# Altium PCB PCB.pcbdoc
Units mm, origin at the board's own origin, x right, y up, seen from the top; angles counter-clockwise.
Board outline 135.64 x 85.89 mm, 2 copper layers (Top Layer, Bottom Layer); 40 components, 49 nets, 156 pads, 109 vias.
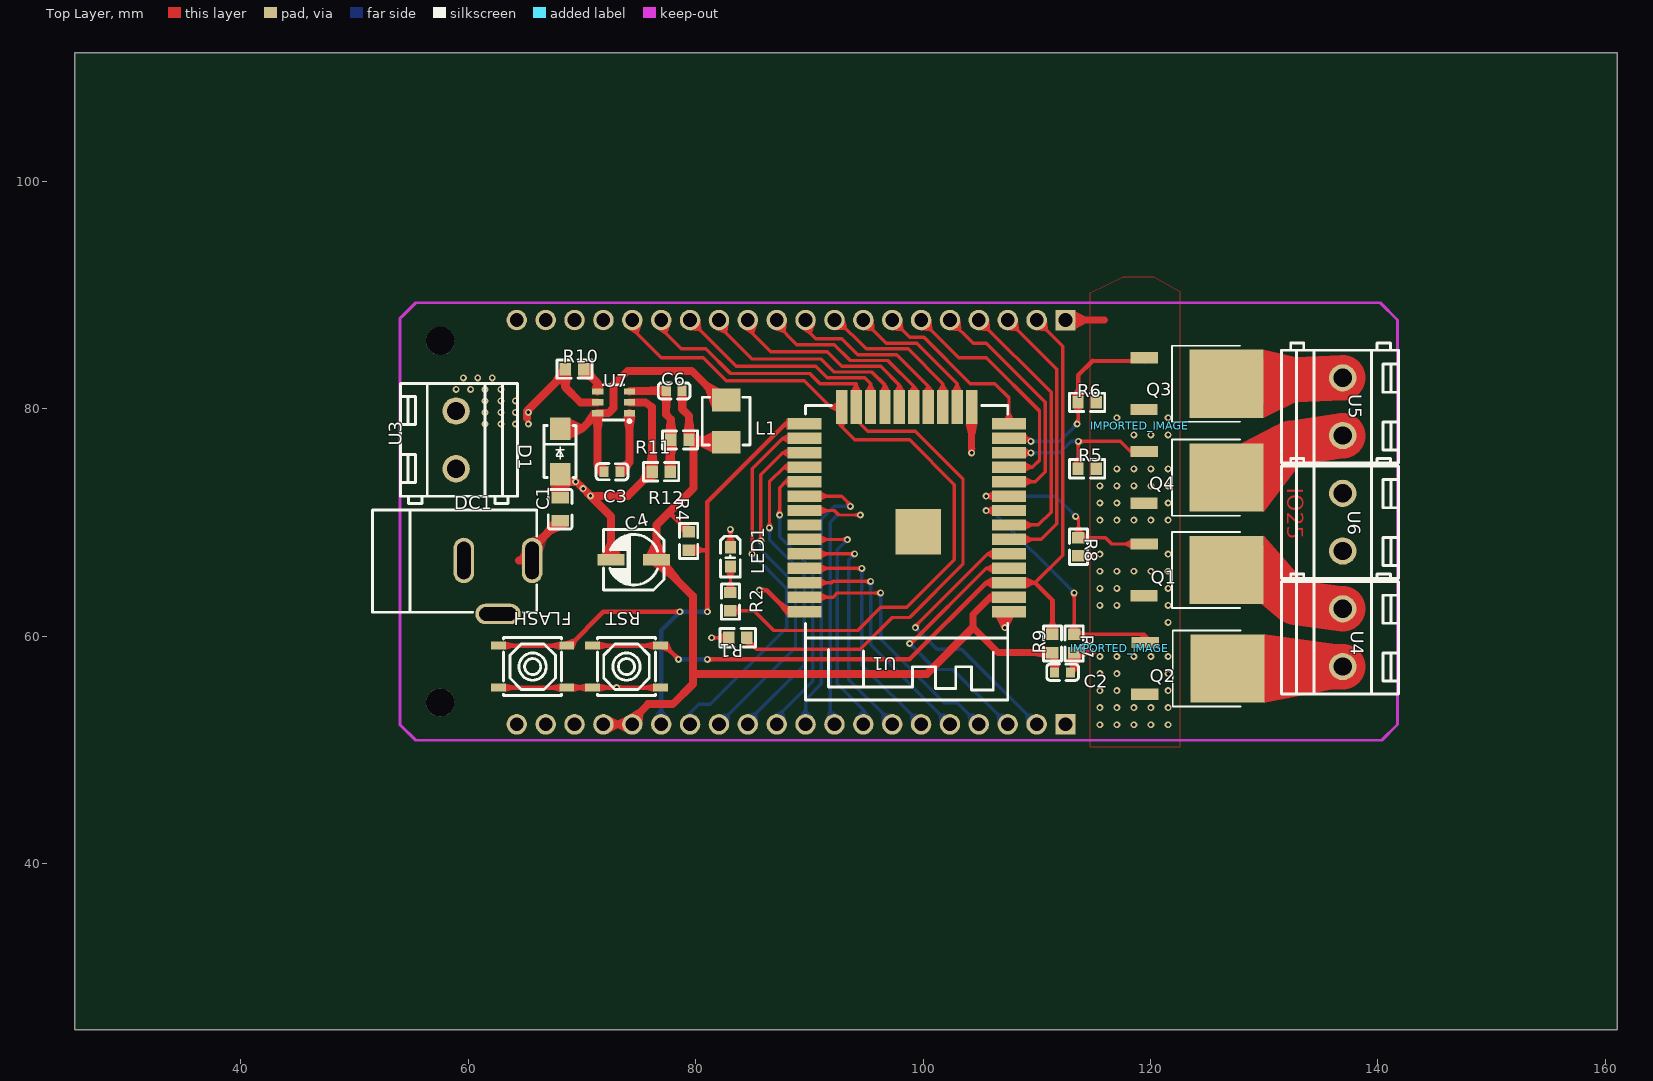
[diagram p0: Top Layer view]
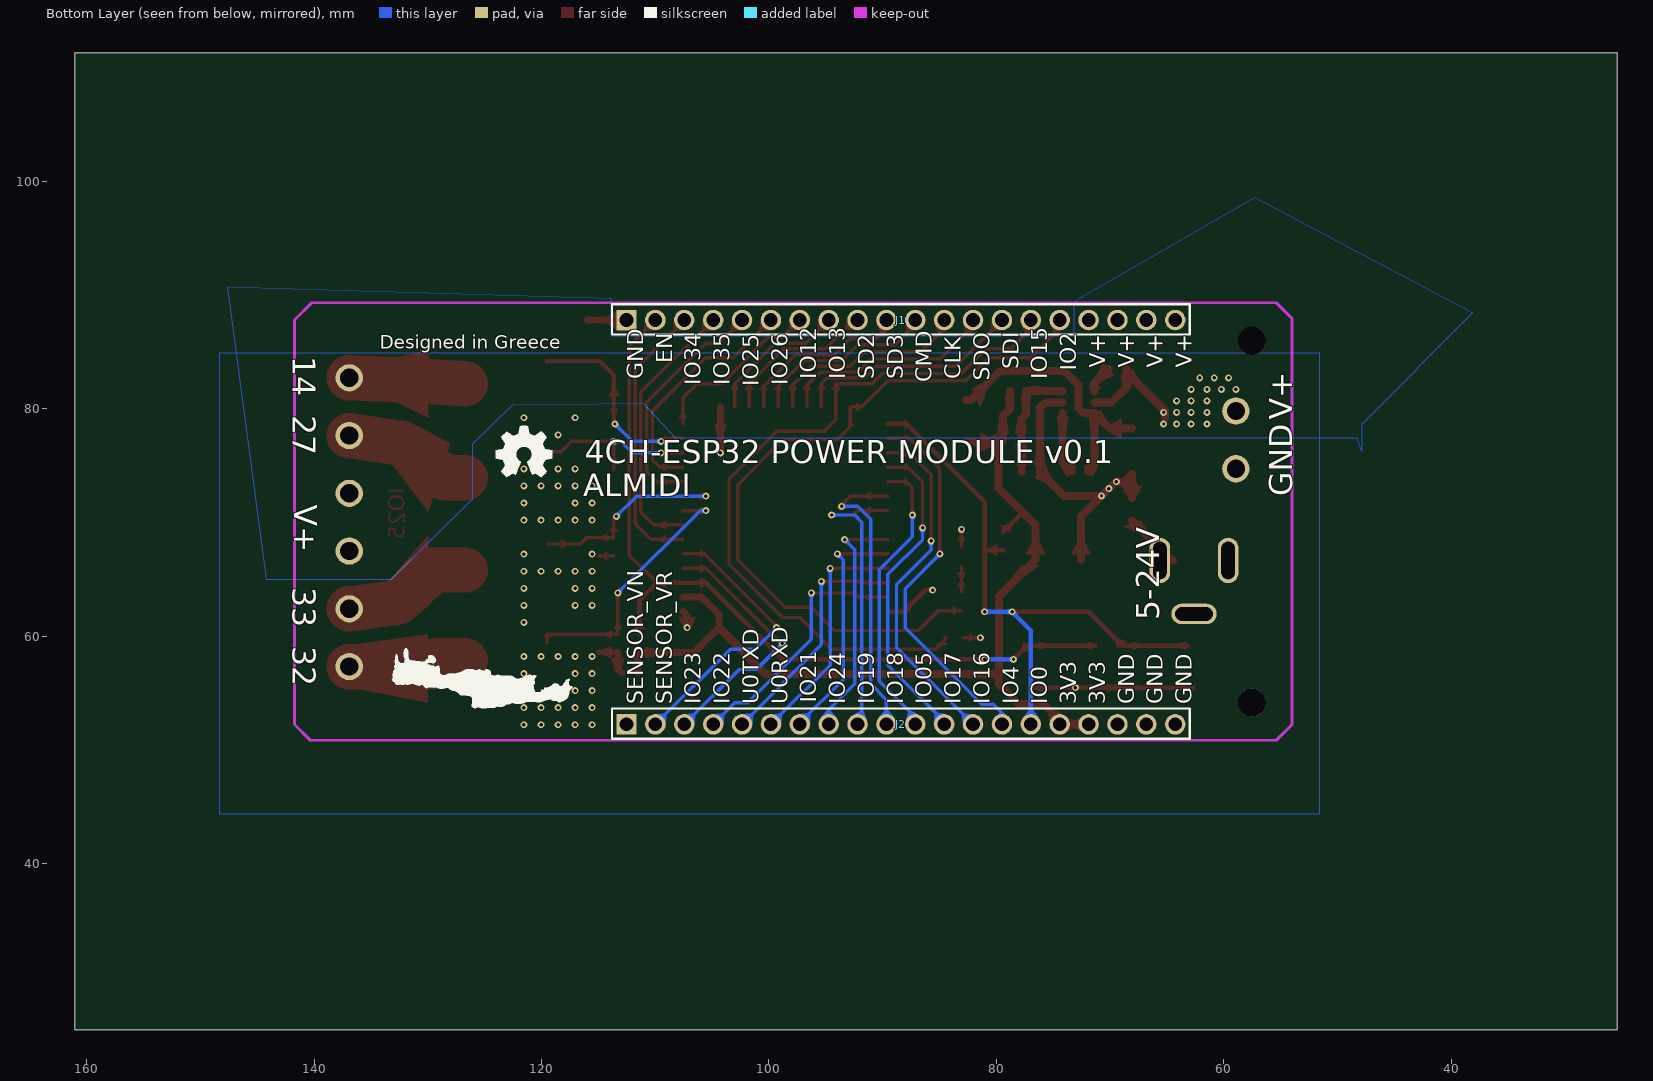
[diagram p1: Bottom Layer view, seen from below]

## Layer stack, top to bottom
Top Layer: signal copper (thickness not stored)
Dielectric: dielectric 0.32, FR-4, Dk 4.8
Bottom Layer: signal copper (thickness not stored)

## Board outline
161.036,25.4 25.4,25.4 25.4,111.295 161.036,111.295

## Components (designator, comment, footprint, x,y, rotation, side; value= is the part's Value field where it differs from the comment)
C1 "10uF" C0805 68.072,71.163 r90 top
C2 "22uF" C0603 112.268,56.812 r0 top
C3 "22nF" C0603 72.644,74.465 r180 top
C4 "47uF" CAP-SMD_BD5.0-L5.3-W5.3-RD 74.549,66.718 r0 top
C6 "100pF" C0603 78.105,81.577 r180 top
D1 "B230A-13-F" SMA_L4.4-W2.6-LS5.0-RD 68.072,76.243 r270 top
DC1 "DC-005-5A-2.0" DC-IN-TH_DC-005-5A-2.0 62.611,64.305 r0 top
FLASH "TS-1187A-B-A-B" SW-SMD_4P-L5.1-W5.1-P3.70-LS6.4 65.659,57.32 r0 top
IMPORTED_IMAGE "IMPORTED_IMAGE" IMPORTED_IMAGE 119.039,78.493 r0 top
IMPORTED_IMAGE "IMPORTED_IMAGE" IMPORTED_IMAGE 117.301,58.954 r0 top
J1 "Top Header" HDR-TH_20P-P2.54-V 88.392,87.8 r0 bottom
J2 "Bottom Header" HDR-TH_20P-P2.54-V 88.392,52.24 r0 bottom
L1 "3.3uH" IND-SMD_L4.2-W4.4_MWSA0402S-XX 82.677,78.91 r270 top
LED1 "0603White light_C2290" LED0603-R-RD 83.058,66.972 r270 top
Q1 "KIA30N06BD" TO-252-2_L6.6-W6.1-P4.57-LS9.9-TL-CW 123.063,65.829 r0 top
Q2 "KIA30N06BD" TO-252-2_L6.6-W6.1-P4.57-LS9.9-TL-CW 123.121,57.164 r0 top
Q3 "KIA30N06BD" TO-252-2_L6.6-W6.1-P4.57-LS9.9-TL-CW 123.063,82.212 r0 top
Q4 "KIA30N06BD" TO-252-2_L6.6-W6.1-P4.57-LS9.9-TL-CW 123.063,73.957 r0 top
R1 "1K" R0603 83.693,59.86 r180 top
R2 "100" R0603 83.058,63.035 r90 top
R4 "1K" R0603 79.375,68.369 r270 top
R5 "1K" R0603 114.427,74.719 r0 top
R6 "1K" R0603 114.427,80.561 r0 top
R7 "1K" R0603 113.284,59.352 r270 top
R8 "1K" R0603 113.665,67.861 r270 top
R9 "1K" R0603 111.379,59.352 r90 top
R10 "100K" R0603 69.342,83.482 r0 top
R11 "49.9K" R0603 78.613,77.259 r180 top
R12 "16.2K" R0603 76.962,74.465 r180 top
RST "TS-1187A-B-A-B" SW-SMD_4P-L5.1-W5.1-P3.70-LS6.4 73.914,57.32 r0 top
U1 "ESP32-S" WIRELM-SMD_ESP32-S 98.552,71.163 r180 top
U3 "DB128V-5.0-2P-OG" CONN-TH_DB128V-5.0-2P-XX 58.928,77.259 r90 top
U4 "DB128V-5.0-2P-OG" CONN-TH_DB128V-5.0-2P-XX 136.906,59.86 r270 top
U5 "DB128V-5.0-2P-OG" CONN-TH_DB128V-5.0-2P-XX 136.906,80.18 r270 top
U6 "DB128V-5.0-2P-OG" CONN-TH_DB128V-5.0-2P-XX 136.906,70.02 r270 top
U7 "AP5100WG-7" SOT-23-6_L2.9-W1.6-P0.95-LS2.8-BR 72.771,80.561 r0 top
? "" ? 97.79,46.084 r0 top
? "" ? 48.951,70.083 r0 top
? "" ? 51.883,87.663 r0 top
? "" ? 52.008,52.464 r0 top

## Footprints (in the part's own frame and the unit in brackets; to place one, negate y for a bottom-side part, rotate by r counter-clockwise, add the part's x,y. Pads: shape width x height; smd on the part's side, far side on the other; paste and mask are expansions set on the pad)
C0603 [mm]
  rect 0.8x0.9 smd: 1(-0.7,0) 2(0.7,0)
  silkscreen extent -1.4,-0.7 1.4,0.72
C0805 [mm]
  rect 1x1.55 smd: 1(-1,0) 2(1,0)
  silkscreen extent -1.75,-1.04 1.75,1.04
CAP-SMD_BD5.0-L5.3-W5.3-RD [mm]
  rect 2.4x1 smd: 1(2,0) 2(-2,0)
  silkscreen extent -2.65,-2.65 2.65,2.65
CONN-TH_DB128V-5.0-2P-XX [mm]
  round 2.4 hole 1.6: 1(-2.54,0) 2(2.54,0)
  silkscreen extent -5.59,-5.4 4.96,4.9
DC-IN-TH_DC-005-5A-2.0 [mm]
  oval 1.8x4 hole 1.2 slot 3.3 at 90 deg: 1(3,2.352) 2(-3,2.352)
  oval 4x1.8 hole 1.2 slot 3.3 at 0 deg: 3(0,-2.352)
  silkscreen extent -11.03,-2.2 3.4,6.81
HDR-TH_20P-P2.54-V [mm]
  rect 1.8x1.8 hole 1.2: 1(24.13,0)
  round 1.8 hole 1.2: 2(21.59,0) 3(19.05,0) 4(16.51,0) 5(13.97,0) 6(11.43,0) 7(8.89,0) 8(6.35,0) 9(3.81,0) 10(1.27,0) 11(-1.27,0) 12(-3.81,0) 13(-6.35,0) 14(-8.89,0) 15(-11.43,0) 16(-13.97,0) 17(-16.51,0) 18(-19.05,0) 19(-21.59,0) 20(-24.13,0)
  silkscreen extent -25.4,-1.4 25.4,1.27
IMPORTED_IMAGE [mm]
IND-SMD_L4.2-W4.4_MWSA0402S-XX [mm]
  rect 2x2.5 smd: 1(-1.85,0) 2(1.85,0)
  silkscreen extent -2.1,-2.1 2.1,2.1
LED0603-R-RD [mil]
  rect 43x39 smd: 1(33.5,0) 2(-33.5,0)
  silkscreen extent -72,-34 70,34
R0603 [mm]
  rect 1x1.1 smd: 1(-0.8,0) 2(0.8,0)
  silkscreen extent -1.55,-0.8 1.55,0.81
SMA_L4.4-W2.6-LS5.0-RD [mm]
  rect 2x1.8 smd: 1(-2,0) 2(2,0)
  silkscreen extent -2.3,-1.4 2.3,1.4
SOT-23-6_L2.9-W1.6-P0.95-LS2.8-BR [mm]
  rect 1x0.55 smd: 1(1.4,-0.95) 2(1.4,0) 3(1.4,0.95) 4(-1.4,0.95) 5(-1.4,0) 6(-1.4,-0.95)
  silkscreen extent -0.9,-1.78 1.52,1.55
SW-SMD_4P-L5.1-W5.1-P3.70-LS6.4 [mm]
  rect 1.3x0.7 smd: 1(-3,1.85) 2(3,1.85) 3(-3,-1.85) 4(3,-1.85)
  silkscreen extent -2.55,-2.55 2.55,2.55
TO-252-2_L6.6-W6.1-P4.57-LS9.9-TL-CW [mm]
  rect 2.409x0.979 smd: 1(-3.597,2.273) 3(-3.637,-2.273)
  rect 6.5x6 smd: 2(3.637,-0.012)
  silkscreen extent -1.17,-3.36 4.8,3.33
WIRELM-SMD_ESP32-S [mm]
  rect 3x1 smd: 1(-9,9.005) 2(-9,7.735) 3(-9,6.465) 4(-9,5.195) 5(-9,3.925) 6(-9,2.655) 7(-9,1.385) 8(-9,0.115) 9(-9,-1.155) 10(-9,-2.425) 11(-9,-3.695) 12(-9,-4.965) 13(-9,-6.235) 14(-9,-7.505) 25(9,-7.505) 26(9,-6.235) 27(9,-4.965) 28(9,-3.695) 29(9,-2.425) 30(9,-1.155) 31(9,0.115) 32(9,1.385) 33(9,2.655) 34(9,3.925) 35(9,5.195) 36(9,6.465) 37(9,7.735) 38(9,9.005)
  rect 1x3 smd: 15(-5.715,-9.005) 16(-4.445,-9.005) 17(-3.175,-9.005) 18(-1.905,-9.005) 19(-0.635,-9.005) 20(0.635,-9.005) 21(1.905,-9.005) 22(3.175,-9.005) 23(4.445,-9.005) 24(5.715,-9.005)
  rect 4x4 smd: 39(-1,1.995)
  silkscreen extent -8.89,-9.13 8.89,16.78
? [mm]

## Free pads (board coordinates)
  round 2.5 hole 2.5 unplated: ""(57.521,54.164) ""(57.521,85.964)

## Via types
v1: diameter 0.61, hole 0.305, Top Layer to Bottom Layer, tented both sides, 109 vias

## Nets (pads, with @x,y where several pads share a name; then routed paths per layer and width w, separated by ;. In a path a pad name is that pad's centre, name@x,y a point inside that pad or via, vN(x,y) a via of type N, cw(c..) or ccw(c..) an arc to the next point about the centre after c; other vN are vias at no path point)
C3_1: C3.1 U7.1 | length 5.5
  Top Layer w0.7: C3.1 74.171,75.292 U7.1
C6_2: C6.2 R11.2 R12.1 U7.3 | length 10.6
  Top Layer w0.7: U7.3 74.237,81.577 C6.2 ; C6.2 77.404,79.484 77.813,79.075 R11.2 77.762,77.208 R12.1
CH1: Q1.2 U4.1 | length 11.3
  Top Layer w4: Q1.2 129.469,65.816 132.721,62.964 U4.1
CH2: Q2.2 U4.2 | length 10.4
  Top Layer w4: Q2.2@126.7,57.815 129.172,57.815 129.667,57.32 U4.2
CH3: Q3.2 U5.1 | length 10.2
  Top Layer w4: Q3.2 132.721,82.564 U5.1
CH4: Q4.2 U5.2 | length 11.3
  Top Layer w4: Q4.2 128.511,73.944 132.321,76.964 U5.2
CLK: J1.12 U1.20 | length 18.1
  Top Layer w0.3: J1.12 84.582,87.038 86.614,85.006 91.567,85.006 92.837,83.736 96.266,83.736 97.917,82.085 U1.20
CMD: J1.11 U1.19 | length 16.5
  Top Layer w0.3: J1.11 87.122,87.419 88.9,85.641 92.202,85.641 93.599,84.244 96.901,84.244 99.187,81.958 U1.19
EN: J1.2 R9.2 RST.1 RST.2 U1.3 | length 72.1
  Top Layer w0.3: 109.842,64.698 112.268,67.124 112.268,85.514 J1.2
  Top Layer w0.4: RST.1@71.295,59.17 RST.2 77.271,59.17 v1(78.486,57.955) ; v1(81.026,57.955) 98.806,57.955 105.549,64.698 U1.3 109.843,64.698 111.379,63.162 R9.2
  Bottom Layer w0.4: v1(78.486,57.955) v1(81.026,57.955)
G_1: Q1.1 R8.1 U1.9 | length 18.6
  Top Layer w0.3: v1(105.537,72.306) 107.54,72.306 U1.9 ; v1(113.411,70.528) 113.665,70.274 R8.1 116.04,68.661 116.599,68.102 Q1.1
  Bottom Layer w0.3: v1(105.537,72.306) 111.633,72.306 v1(113.411,70.528)
G_2: Q2.1 R7.1 U1.8 | length 23.3
  Top Layer w0.3: v1(105.537,71.036) 107.54,71.036 U1.8 ; R7.1 v1(113.284,63.797) ; R7.1 119.466,60.152 Q2.1
  Bottom Layer w0.3: v1(105.537,71.036) 106.045,71.036 v1(113.284,63.797)
G_3: Q3.1 R6.1 U1.13 | length 17.5
  Top Layer w0.3: U1.13 109.208,77.398 v1(109.474,77.132) ; v1(113.538,78.656) 113.627,78.745 R6.1
  Top Layer w0.4: R6.1 113.627,82.936 114.922,84.231 Q3.1@119.521,84.164
  Bottom Layer w0.3: v1(109.474,77.132) 112.014,77.132 v1(113.538,78.656)
G_4: Q4.1 R5.1 U1.12 | length 15.1
  Top Layer w0.3: U1.12 109.462,76.128 v1(109.474,76.116) ; R5.1 113.627,77.094 v1(113.665,77.132) 117.348,77.132 118.25,76.23 Q4.1
  Bottom Layer w0.3: v1(109.474,76.116) 112.014,76.116 113.03,77.132 v1(113.665,77.132)
GND: C1.2 C2.2 C4.2 D1.2 DC1.2 DC1.3 FLASH.3 FLASH.4 J1.1 J2.18 J2.19 J2.20 LED1.2 Q1.3 Q2.3 Q3.3 Q4.3 R1.2 R5.2 R6.2 R7.2 R8.2 R12.2 RST.3 RST.4 U1.1 U1.15 U1.38 U3.1 U7.2 | length 61.6
  Top Layer w0.3: v1(81.407,59.86) R1.2 ; LED1.2 v1(83.058,69.385) ; R8.2 114.935,67.061
  Top Layer w0.4: FLASH.3 FLASH.3@62.829,55.47 ; FLASH.3@63.167,55.47 FLASH.4 RST.3 v1(73.043,55.47) ; v1(73.043,55.47) RST.4 ; v1(85.598,64.051) 86.233,64.051 88.125,62.158 U1.38
  Top Layer w0.5: R7.2 113.322,58.59 114.935,58.59
  Top Layer w0.6: v1(104.267,76.116) U1.15 ; v1(107.188,60.749) 107.188,61.794 U1.1 ; J1.1 115.951,87.8 ; C2.2 113.284,57.128 R7.2
  Top Layer w0.7: C1.2 D1.2 68.739,73.576 v1(69.443,73.576) 69.501,73.576 v1(70.104,72.973) v1(70.747,72.329) ; C4.2 72.549,70.528 v1(70.747,72.329) ; U7.2 75.565,80.561 76.162,80.136 76.162,78.275 R12.2 74.027,72.329 v1(70.747,72.329)
  other v1: 115.54,52.208 117.04,52.208 118.54,52.208 120.04,52.208 121.54,52.208 115.54,53.708 117.04,53.708 118.54,53.708 120.04,53.708 121.54,53.708 115.54,55.208 117.04,55.208 121.54,55.208 115.54,56.708 117.04,56.708 121.54,56.708 115.54,58.208 117.04,58.208 118.54,58.208 120.04,58.208 121.54,58.208 121.54,61.208 115.54,62.708 117.04,62.708 121.54,62.708 115.54,64.208 117.04,64.208 121.54,64.208 115.54,65.708 117.04,65.708 118.54,65.708 120.04,65.708 121.54,65.708 115.54,67.208 121.54,67.208 115.54,70.208 117.04,70.208 118.54,70.208 120.04,70.208 121.54,70.208 115.54,71.708 117.04,71.708 121.54,71.708 115.54,73.208 117.04,73.208 118.54,73.208 120.04,73.208 121.54,73.208 117.04,74.708 118.54,74.708 120.04,74.708 121.54,74.708 118.54,77.708 120.04,77.708 121.54,77.708 117.04,79.208 121.54,79.208
IO0: FLASH.1 FLASH.2 J2.15 R4.2 U1.25 | length 52.4
  Top Layer w0.4: FLASH.1@63.167,59.17 FLASH.2 68.906,59.17 71.882,62.146 v1(78.613,62.146) ; R4.2 81.026,67.574 ; v1(81.026,62.146) 81.026,71.798 87.897,78.668 U1.25
  Bottom Layer w0.4: J2.15 76.962,60.495 v1(78.613,62.146) v1(81.026,62.146)
IO2: J1.16 R2.1 U1.24 | length 65.4
  Top Layer w0.3: J1.16 74.422,87.038 76.962,84.498 80.645,84.498 82.677,82.466 89.535,82.466 91.833,80.168 U1.24 92.837,78.402 93.98,77.259 98.806,77.259 102.743,73.322 102.743,66.718 98.552,62.527 96.266,62.527 94.234,60.495 86.868,60.495 85.128,62.235 R2.1
IO4: J2.14 U1.26 | length 33.6
  Top Layer w0.3: v1(84.963,67.226) 84.963,74.719 87.643,77.398 U1.26
  Bottom Layer w0.3: J2.14 79.502,53.256 80.264,54.018 81.28,54.018 88.011,60.749 88.011,64.178 v1(84.963,67.226)
IO5: J2.11 U1.29 | length 25.7
  Top Layer w0.3: v1(87.376,70.655) 87.376,73.068 87.897,73.588 U1.29
  Bottom Layer w0.3: J2.11 87.122,52.875 90.297,56.05 90.297,65.829 87.376,68.75 v1(87.376,70.655)
IO12: J1.7 U1.14 | length 15.4
  Top Layer w0.3: J1.7 98.806,86.276 100.076,86.276 104.14,82.212 106.299,82.212 107.552,80.959 U1.14
IO13: J1.8 U1.16 | length 12.6
  Top Layer w0.3: J1.8 96.774,85.768 99.441,85.768 102.997,82.212 U1.16
IO15: J1.15 R1.1 U1.23 | length 64.8
  Top Layer w0.3: J1.15 76.962,87.038 78.74,85.26 80.899,85.26 83.058,83.101 90.043,83.101 90.932,82.212 94.107,82.212 U1.23 94.107,79.037 95.123,78.021 99.314,78.021 103.505,73.83 103.505,66.337 98.806,61.638 97.282,61.638 94.488,58.844 88.138,58.844 85.344,58.844 84.493,59.695 R1.1
IO16: J2.13 U1.27 | length 30.6
  Top Layer w0.3: v1(85.725,68.369) 85.725,74.211 87.642,76.128 U1.27
  Bottom Layer w0.3: J2.13 88.773,58.971 88.773,64.559 85.725,67.607 v1(85.725,68.369)
IO17: J2.12 U1.28 | length 28.2
  Top Layer w0.3: v1(86.487,69.512) 86.487,73.576 87.769,74.858 U1.28
  Bottom Layer w0.3: J2.12 84.582,52.494 89.535,57.447 89.535,65.448 86.487,68.496 v1(86.487,69.512)
IO18: J2.10 U1.30 | length 26.1
  Top Layer w0.3: U1.30 92.825,72.318 93.599,71.544 v1(93.599,71.417)
  Bottom Layer w0.3: J2.10 89.662,54.399 91.059,55.796 91.059,70.274 92.202,71.417 v1(93.599,71.417)
IO19: J2.9 U1.31 | length 26.2
  Top Layer w0.3: U1.31 92.19,71.048 92.583,70.655 v1(94.488,70.655)
  Bottom Layer w0.3: J2.9 91.821,52.24 91.821,70.02 92.456,70.655 v1(94.488,70.655)
IO21: J2.8 U1.33 | length 21.4
  Top Layer w0.3: U1.33 89.564,68.496 v1(93.345,68.496)
  Bottom Layer w0.3: v1(93.345,68.496) 92.456,67.607 92.456,55.796 94.742,53.51 J2.8
IO22: J2.5 U1.36 | length 21.3
  Top Layer w0.3: U1.36 91.96,64.698 92.075,64.813 v1(95.377,64.813)
  Bottom Layer w0.3: v1(95.377,64.813) 95.377,59.225 J2.5
IO23: J2.4 U1.37 | length 22.7
  Top Layer w0.3: U1.37 92.087,63.428 92.456,63.797 v1(96.266,63.797)
  Bottom Layer w0.3: v1(96.266,63.797) 96.266,59.733 101.854,54.145 102.997,54.145 J2.4
IO25: J1.5 U1.10 | length 21
  Top Layer w0.3: J1.5 104.394,85.768 105.537,85.768 110.744,80.561 110.744,74.465 109.868,73.588 U1.10
IO26: J1.6 U1.11 | length 21
  Top Layer w0.3: J1.6 103.124,84.498 105.537,84.498 110.236,79.799 110.236,75.481 109.614,74.858 U1.11
IO34: J1.3 U1.6 | length 24.5
  Top Layer w0.3: J1.3 111.76,83.482 111.76,69.893 110.376,68.508 U1.6
IO35: J1.4 U1.7 | length 23.7
  Top Layer w0.3: J1.4 111.252,81.45 111.252,70.909 110.122,69.778 U1.7
J2_1: J2.1
L1_1: C3.2 D1.1 L1.1 U7.6 | length 24.4
  Top Layer w0.7: D1.1 70.003,78.243 U7.6 ; C3.2 71.371,75.038 U7.6 ; L1.1 82.224,80.76 79.647,83.337 74.023,83.337 72.771,82.085 72.771,80.053 72.329,79.611 U7.6
LED1_1: LED1.1 R2.2 | length 2.3
  Top Layer w0.3: R2.2 LED1.1
NC: U1.32
R10_2: R10.2 U7.4 | length 2.5
  Top Layer w0.7: R10.2 71.371,82.253 U7.4
S$68: 
SD2: J1.9 U1.17 | length 13.9
  Top Layer w0.3: J1.9 92.456,87.8 94.996,85.26 98.679,85.26 101.727,82.212 U1.17
SD3: J1.10 U1.18 | length 15.5
  Top Layer w0.3: J1.10 89.662,87.038 90.551,86.149 92.837,86.149 94.234,84.752 97.663,84.752 100.457,81.958 U1.18
SDI: J1.14 U1.22 | length 20.2
  Top Layer w0.3: J1.14 83.566,83.736 90.551,83.736 91.567,82.72 94.869,82.72 95.377,82.212 U1.22
SDO: J1.13 U1.21 | length 19.2
  Top Layer w0.3: J1.13 82.042,87.292 84.963,84.371 91.059,84.371 92.202,83.228 95.504,83.228 96.647,82.085 U1.21
SENSOR_VN: J2.2 U1.5 | length 25.2
  Top Layer w0.3: v1(99.314,60.749) 99.314,60.876 105.676,67.238 U1.5
  Bottom Layer w0.3: v1(99.314,60.749) 101.219,58.844 103.378,58.844 J2.2
SENSOR_VP: J2.3 U1.4 | length 23.1
  Top Layer w0.3: v1(98.806,59.352) 98.933,59.352 105.549,65.968 U1.4
  Bottom Layer w0.3: v1(98.806,59.352) 101.092,57.066 102.616,57.066 J2.3
U0RXD: J2.7 U1.34 | length 21.2
  Top Layer w0.3: U1.34 93.98,67.238 v1(93.98,67.226)
  Bottom Layer w0.3: v1(93.98,67.226) 93.472,66.718 93.472,56.177 97.282,52.367 J2.7
U0TXD: J2.6 U1.35 | length 20.9
  Top Layer w0.3: U1.35 89.564,65.956 v1(94.615,65.956)
  Bottom Layer w0.3: v1(94.615,65.956) 94.615,57.447 J2.6
U1_39: U1.39
V24: C1.1 DC1.1 J1.17 J1.18 J1.19 J1.20 R10.1 U3.2 U6.1 U6.2 U7.5 | length 15.8
  Top Layer w0.7: 64.468,66.656 64.566,66.656 C1.1 ; 65.151,79.164 65.151,79.799 68.542,83.19 R10.1 68.542,81.869 69.85,80.561 U7.5
  other v1: 61.468,78.656 62.865,78.656 64.135,78.656 65.278,78.656 61.468,79.672 62.865,79.672 64.135,79.672 65.278,79.672 61.468,80.688 62.865,80.688 64.135,80.688 58.928,81.704 60.198,81.704 61.468,81.704 62.865,81.704 59.563,82.72 60.833,82.72 62.103,82.72
VCC: C2.1 C4.1 C6.1 J2.16 J2.17 L1.2 R4.1 R9.1 R11.1 U1.2 | length 89.8
  Top Layer w0.4: 77.663,70.883 R4.1
  Top Layer w0.6: U1.2 105.93,63.428 104.394,61.892 104.394,60.749 106.591,58.552 ; R9.1 106.591,58.552 ; C2.1 111.567,58.021 111.036,58.552 106.591,58.552
  Top Layer w0.7: J2.17 J2.16 74.422,52.621 75.819,54.018 77.978,54.018 79.756,55.796 79.756,56.685 ; C4.1 76.548,69.768 79.794,73.014 79.794,76.878 R11.1 ; C4.1 79.756,63.511 79.756,56.685 ; C6.1 78.806,79.987 79.413,79.38 R11.1 ; L1.2 79.612,77.06 R11.1 ; 104.394,60.749 100.33,56.685 79.756,56.685

## Polygon pours and split planes (outlines as drawn)
GND on Bottom Layer (solid): 51.562,84.879 148.336,84.879 148.336,44.366 51.562,44.366
V24 on Bottom Layer (solid): 38.1,88.435 47.879,78.656 47.879,76.243 48.26,77.386 108.204,77.386 110.998,80.434 122.555,80.307 126.111,76.878 126.111,72.052 133.27,64.94 144.145,64.94 147.574,90.721 113.919,89.705 113.919,86.403 73.152,86.403 73.152,89.451 57.277,98.595
V24 on Top Layer (solid): 68.199,64.686 67.31,63.67 63.881,63.67 62.23,65.321 62.23,70.909 62.23,74.592 59.817,77.005 58.293,77.005 56.642,78.656 56.642,80.815 59.309,83.482 62.23,83.482 66.04,79.672 66.04,69.893 68.199,67.734 68.199,67.226 68.199,66.337 68.199,65.448
GND on Top Layer (solid): 122.555,90.34 122.555,83.228 122.555,50.208 114.681,50.208 114.681,82.593 114.681,83.609 114.681,90.213 117.602,91.61 120.269,91.61

## Other copper
Top Layer:
  region net GND: 113.422,87.05 113.422,88.55 114.322,88.1 114.322,87.5
  region net R10_2: 70.871,81.786 71.871,81.786 71.721,82.253 71.021,82.253
  region net L1_1: 71.871,79.336 70.871,79.886 70.279,79.013 70.917,78.662
  region net L1_1: 71.871,79.336 70.871,79.336 71.021,78.286 71.721,78.286
  region net C3_1: 74.671,79.336 73.671,79.336 73.821,78.286 74.521,78.286
  region net G_4: 118.262,75.855 118.262,76.605 118.25,76.38 118.25,76.08
  region net CH4: 128.008,76.944 129.95,70.945 132.979,74.933 131.079,78.531
  region net CH3: 129.95,85.199 129.95,79.2 132.721,80.56 132.6,84.56
  region net G_2: 119.11,59.926 119.86,59.926 119.617,60.152 119.317,60.14
  region net CH2: 130.008,60.151 130.008,54.152 136.008,55.32 136.008,59.32
  region net G_1: 118.262,67.727 118.262,68.477 117.812,68.252 117.812,67.952
  region net CH1: 129.95,68.816 129.769,62.817 131.402,61.46 132.799,65.555
  region net GND: 71.674,67.218 73.424,67.218 72.899,68.268 72.199,68.268
  region net VCC: 75.673,67.218 77.423,67.218 76.898,68.268 76.198,68.268
  region net VCC: 77.749,66.218 76.174,66.218 77.604,65.168 78.594,65.168
  region net VCC: 81.427,76.185 81.427,77.935 80.377,77.41 80.377,76.71
  region net L1_1: 81.427,80.145 82.103,81.76 81.187,82.292 80.895,81.594
  region net IO15: 84.993,59.523 84.274,59.31 84.938,59.038 85.265,59.135
  region net GND: 82.393,59.485 82.393,60.235 81.943,60.01 81.943,59.71
  region net IO2: 83.608,62.61 83.608,61.86 84.058,62.085 84.058,62.385
  region net LED1_1: 82.683,64.335 83.433,64.335 83.208,64.785 82.908,64.785
  region net GND: 82.683,68.369 83.433,68.369 83.208,68.819 82.908,68.819
  region net LED1_1: 83.433,65.575 82.683,65.575 82.908,65.125 83.208,65.125
  region net GND: 67.297,72.663 68.847,72.663 68.422,73.713 67.722,73.713
  region net V24: 68.847,69.663 67.297,70.143 66.657,69.243 67.412,69.008
  region net L1_1: 68.972,79.118 68.972,77.368 70.003,77.893 70.003,78.593
  region net GND: 68.947,73.243 67.197,73.243 67.722,72.193 68.422,72.193
  region net C6_2: 77.005,81.127 77.005,82.027 75.955,81.927 75.955,81.227
  region net C6_2: 77.805,81.127 77.005,81.127 77.054,80.077 77.754,80.077
  region net VCC: 79.205,81.127 78.405,81.127 78.456,80.077 79.156,80.077
  region net VCC: 111.168,57.262 111.968,57.262 111.867,58.021 111.267,58.021
  region net L1_1: 71.544,74.015 72.344,74.915 71.618,75.285 71.138,74.776
  region net C3_1: 72.944,74.915 73.744,74.015 74.321,74.946 73.855,75.47
  region net V24: 69.042,82.932 68.042,82.932 68.192,81.882 68.892,81.882
  region net V24: 69.042,82.932 68.042,83.5 67.473,82.616 68.104,82.257
  region net R10_2: 70.642,84.032 69.642,82.932 70.65,82.479 71.121,82.998
  region net VCC: 79.913,77.809 79.913,76.709 80.963,76.71 80.963,77.41
  region net VCC: 78.913,77.809 79.913,77.809 79.763,78.859 79.063,78.859
  region net C6_2: 78.313,76.709 77.313,76.709 77.412,75.659 78.112,75.659
  region net C6_2: 77.313,77.809 78.313,77.809 78.163,78.859 77.463,78.859
  region net C6_2: 77.262,75.015 78.262,75.015 78.112,76.065 77.412,76.065
  region net GND: 75.662,75.015 76.662,75.015 76.512,76.065 75.812,76.065
  region net GND: 76.662,73.915 75.662,75.015 75.183,73.981 75.654,73.462
  region net VCC: 110.829,58.052 110.829,59.052 109.929,58.852 109.929,58.252
  region net VCC: 111.929,58.109 111.376,58.08 111.779,58.233 111.929,58.109
  region net VCC: 111.376,58.08 111.164,58 110.829,58.052 111.376,58.08
  region net VCC: 110.829,58.052 110.829,59.052 109.929,58.852 109.929,58.252
  region net EN: 110.879,60.652 111.879,60.652 111.579,61.252 111.179,61.252
  region net GND: 104.767,78.668 103.767,78.668 103.967,77.768 104.567,77.768
  region net IO13: 102.622,81.668 103.372,81.668 103.147,82.118 102.847,82.118
  region net SD2: 101.352,81.668 102.102,81.668 101.877,82.118 101.577,82.118
  region net SD3: 100.082,81.668 100.832,81.668 100.607,81.958 100.307,81.958
  region net CMD: 98.812,81.668 99.562,81.668 99.337,81.958 99.037,81.958
  region net CLK: 97.542,81.668 98.292,81.668 98.067,82.085 97.767,82.085
  region net SDO: 96.272,81.668 97.022,81.668 96.797,82.085 96.497,82.085
  region net SDI: 95.002,81.668 95.752,81.668 95.527,82.118 95.227,82.118
  region net IO15: 93.732,81.668 94.482,81.668 94.257,82.118 93.957,82.118
  region net IO2: 93.212,78.668 92.462,78.668 92.687,78.402 92.987,78.402
  region net IO2: 92.337,79.793 92.337,80.543 91.887,80.318 91.887,80.018
  region net GND: 107.938,61.658 106.438,61.658 106.888,60.758 107.488,60.758
  region net VCC: 106.052,62.928 106.052,63.928 105.93,63.728 105.93,63.128
  region net EN: 109.052,65.198 109.052,64.198 109.652,64.498 109.652,64.898
  region net EN: 106.052,64.198 106.052,65.198 105.549,64.898 105.549,64.498
  region net SENSOR_VP: 106.052,65.593 106.052,66.343 105.602,66.118 105.602,65.818
  region net SENSOR_VN: 106.052,66.863 106.052,67.613 105.676,67.388 105.676,67.088
  region net IO34: 109.052,68.883 109.052,68.133 109.502,68.358 109.502,68.658
  region net IO35: 109.052,70.153 109.052,69.403 109.502,69.628 109.502,69.928
  region net G_2: 106.052,70.661 106.052,71.411 105.602,71.186 105.602,70.886
  region net G_1: 106.052,71.931 106.052,72.681 105.602,72.456 105.602,72.156
  region net IO25: 109.052,73.963 109.052,73.213 109.502,73.438 109.502,73.738
  region net IO26: 109.052,75.233 109.052,74.483 109.502,74.708 109.502,75.008
  region net G_4: 109.052,76.503 109.052,75.753 109.462,75.978 109.462,76.278
  region net G_3: 109.052,77.773 109.052,77.023 109.208,77.248 109.208,77.548
  region net IO12: 107.177,79.168 107.927,79.168 107.702,79.618 107.402,79.618
  region net IO0: 88.052,78.168 88.052,79.168 87.897,78.868 87.897,78.468
  region net IO4: 88.052,77.023 88.052,77.773 87.643,77.548 87.643,77.248
  region net IO16: 88.052,75.753 88.052,76.503 87.642,76.278 87.642,75.978
  region net IO17: 88.052,74.483 88.052,75.233 87.769,75.008 87.769,74.708
  region net IO5: 88.052,73.213 88.052,73.963 87.897,73.738 87.897,73.438
  region net IO18: 91.052,72.693 91.052,71.943 91.502,72.168 91.502,72.468
  region net IO19: 91.052,71.423 91.052,70.673 91.502,70.898 91.502,71.198
  region net IO21: 91.052,68.871 91.052,68.121 91.502,68.346 91.502,68.646
  region net U0RXD: 91.052,67.613 91.052,66.863 91.502,67.088 91.502,67.388
  region net U0TXD: 91.052,66.331 91.052,65.581 91.502,65.806 91.502,66.106
  region net IO22: 91.052,65.073 91.052,64.323 91.502,64.548 91.502,64.848
  region net IO23: 91.052,63.803 91.052,63.053 91.502,63.278 91.502,63.578
  region net GND: 88.052,61.732 88.052,62.658 87.452,63.114 87.452,62.549
  region net G_1: 113.29,69.161 114.04,69.161 113.815,69.611 113.515,69.611
  region net G_1: 114.215,69.036 114.215,68.286 114.665,68.511 114.665,68.811
  region net GND: 114.215,67.436 114.215,66.686 114.665,66.911 114.665,67.211
  region net G_2: 112.909,60.652 113.659,60.652 113.434,61.102 113.134,61.102
  region net G_2: 113.834,60.527 113.834,59.777 114.284,60.002 114.284,60.302
  region net GND: 113.834,58.052 112.734,58.052 112.984,57.152 113.584,57.152
  region net GND: 113.834,59.052 113.834,58.052 114.584,58.34 114.584,58.84
  region net G_3: 113.127,81.111 114.127,81.111 113.827,81.711 113.427,81.711
  region net G_3: 114.002,80.011 113.252,80.011 113.477,79.561 113.777,79.561
  region net G_4: 113.252,75.269 114.002,75.269 113.777,75.719 113.477,75.719
  region net VCC: 78.825,69.097 79.646,69.669 78.928,69.9 78.594,69.668
  region net IO0: 79.925,68.069 79.925,67.07 80.525,67.372 80.525,67.772
  region net GND: 76.264,55.12 76.264,55.82 75.664,55.67 75.664,55.27
  region net GND: 71.564,55.82 71.564,55.12 72.164,55.27 72.164,55.67
  region net GND: 70.264,55.12 70.264,55.82 69.664,55.67 69.664,55.27
  region net EN: 76.264,58.82 76.264,59.52 75.664,59.37 75.664,58.97
  region net EN: 77.564,59.52 77.01,58.82 77.582,58.576 77.832,58.891
  region net EN: 71.564,59.52 71.564,58.82 72.164,58.97 72.164,59.37
  region net GND: 69.309,55.82 69.309,55.12 69.909,55.27 69.909,55.67
  region net GND: 68.009,55.12 68.009,55.82 67.409,55.67 67.409,55.27
  region net GND: 63.309,55.82 63.309,55.12 63.909,55.27 63.909,55.67
  region net IO0: 68.009,58.82 68.009,59.52 67.409,59.37 67.409,58.97
  region net IO0: 68.484,59.52 69.309,58.955 69.542,59.522 69.206,59.752
  region net IO0: 63.309,59.52 63.309,58.82 63.909,58.97 63.909,59.37
  region net GND: 104.038,76.317 104.496,76.317 104.567,76.531 103.967,76.531
  region net GND: 106.959,60.95 107.417,60.95 107.488,61.164 106.888,61.164
  region net IO5: 87.147,70.856 87.605,70.856 87.526,71.07 87.226,71.07
  region net IO18: 93.298,71.464 93.683,71.71 93.506,71.849 93.246,71.684
  region net IO19: 94.286,70.426 94.286,70.883 94.073,70.805 94.073,70.505
  region net IO21: 93.143,68.267 93.143,68.724 92.93,68.646 92.93,68.346
  region net IO22: 95.175,64.584 95.175,65.041 94.962,64.963 94.962,64.663
  region net IO23: 96.064,63.568 96.064,64.025 95.851,63.947 95.851,63.647
  region net U0RXD: 93.785,67.46 93.772,67.003 93.561,67.088 93.57,67.388
  region net U0TXD: 94.413,65.727 94.413,66.184 94.2,66.106 94.2,65.806
  region net IO17: 86.258,69.713 86.716,69.713 86.637,69.927 86.337,69.927
  region net IO16: 85.496,68.57 85.954,68.57 85.875,68.784 85.575,68.784
  region net IO4: 84.734,67.427 85.192,67.427 85.113,67.641 84.813,67.641
  region net SENSOR_VN: 99.23,61.042 99.615,60.796 99.667,61.016 99.407,61.181
  region net SENSOR_VP: 99.099,59.267 98.853,59.653 99.073,59.704 99.239,59.445
  region net EN: 81.228,57.726 81.228,58.183 81.441,58.155 81.441,57.755
  region net EN: 78.505,58.259 78.182,57.936 78.051,58.107 78.334,58.39
  region net GND: 72.842,55.241 72.842,55.698 72.628,55.67 72.628,55.27
  region net GND: 73.245,55.241 73.245,55.698 73.458,55.67 73.458,55.27
  region net IO0: 78.411,61.917 78.411,62.374 78.198,62.346 78.198,61.946
  region net IO0: 80.797,62.347 81.255,62.347 81.226,62.561 80.826,62.561
  region net GND: 81.609,59.631 81.609,60.088 81.822,60.01 81.822,59.71
  region net GND: 82.829,69.183 83.287,69.183 83.208,68.97 82.908,68.97
  region net GND: 85.8,63.822 85.8,64.279 86.013,64.251 86.013,63.851
  region net G_1: 105.739,72.077 105.739,72.534 105.952,72.456 105.952,72.156
  region net G_2: 105.739,70.807 105.739,71.264 105.952,71.186 105.952,70.886
  region net G_3: 109.493,77.436 109.17,77.113 109.102,77.292 109.314,77.504
  region net G_4: 109.279,76.35 109.266,75.893 109.055,75.978 109.064,76.278
  region net G_3: 113.805,78.803 113.358,78.902 113.477,79.094 113.777,79.028
  region net G_4: 113.874,76.91 113.419,76.952 113.477,76.732 113.777,76.705
  region net G_4: 113.867,76.903 113.867,77.36 114.08,77.282 114.08,76.982
  region net G_1: 113.715,70.547 113.392,70.223 113.559,70.168 113.771,70.38
  region net G_2: 113.055,63.595 113.513,63.595 113.434,63.382 113.134,63.382
  region net VCC: 73.827,51.565 73.827,52.915 73.197,52.59 73.197,51.89
  region net VCC: 75.311,52.382 74.17,53.104 74.773,53.467 75.38,53.084
  region net VCC: 72.477,51.565 72.477,52.915 73.107,52.59 73.107,51.89
  region net EN: 109.926,86.901 110.88,87.856 110.954,87.039 110.742,86.827
  region net IO34: 107.386,86.901 108.34,87.856 108.414,87.039 108.202,86.827
  region net IO35: 104.846,86.901 105.8,87.856 105.874,87.039 105.662,86.827
  region net IO25: 102.306,86.901 103.26,87.856 103.334,87.039 103.122,86.827
  region net IO26: 99.766,86.901 100.72,87.856 100.794,87.039 100.582,86.827
  region net IO12: 97.226,86.901 98.18,87.856 98.254,87.039 98.042,86.827
  region net IO13: 94.686,86.901 95.64,87.856 95.714,87.039 95.502,86.827
  region net SD2: 93.082,87.987 92.278,86.903 93.096,86.948 93.276,87.191
  region net SD3: 90.494,87.455 89.216,87.018 89.901,86.586 90.217,86.695
  region net CMD: 88.011,87.657 86.87,86.936 87.647,86.682 87.907,86.846
  region net CLK: 85.414,87.455 84.136,87.018 84.821,86.586 85.137,86.695
  region net SDO: 82.917,87.59 81.725,86.957 82.478,86.644 82.755,86.791
  region net SDI: 79.446,86.901 80.4,87.856 80.474,87.039 80.262,86.827
  region net IO15: 77.794,87.455 76.516,87.018 77.201,86.586 77.517,86.695
  region net IO2: 75.254,87.455 73.976,87.018 74.661,86.586 74.977,86.695
  text "IO25" at 132.015,73.068 h1.4 r270
Bottom Layer:
  region net IO5: 87.147,70.453 87.605,70.453 87.526,70.24 87.226,70.24
  region net IO18: 93.397,71.188 93.397,71.645 93.184,71.567 93.184,71.267
  region net IO19: 94.286,70.426 94.286,70.883 94.073,70.805 94.073,70.505
  region net IO21: 93.364,68.191 93.041,68.515 92.946,68.308 93.158,68.096
  region net IO22: 95.148,64.611 95.606,64.611 95.527,64.398 95.227,64.398
  region net IO23: 96.037,63.595 96.495,63.595 96.416,63.382 96.116,63.382
  region net U0RXD: 93.999,66.921 93.676,67.245 93.581,67.038 93.793,66.826
  region net U0TXD: 94.386,65.754 94.844,65.754 94.765,65.541 94.465,65.541
  region net IO17: 86.258,69.31 86.716,69.31 86.637,69.097 86.337,69.097
  region net IO16: 85.496,68.167 85.954,68.167 85.875,67.954 85.575,67.954
  region net IO4: 85.267,67.245 84.944,66.921 85.15,66.826 85.362,67.038
  region net SENSOR_VN: 99.618,60.768 99.295,60.444 99.501,60.349 99.713,60.561
  region net SENSOR_VP: 99.11,59.371 98.787,59.047 98.993,58.952 99.205,59.164
  region net EN: 80.824,57.726 80.824,58.183 80.611,58.155 80.611,57.755
  region net EN: 78.688,57.726 78.688,58.183 78.901,58.155 78.901,57.755
  region net IO0: 78.815,61.917 78.815,62.374 79.028,62.346 79.028,61.946
  region net IO0: 78.632,61.841 78.309,62.165 78.178,61.994 78.461,61.711
  region net IO0: 80.824,61.917 80.824,62.374 80.611,62.346 80.611,61.946
  region net G_1: 105.739,72.077 105.739,72.534 105.952,72.456 105.952,72.156
  region net G_2: 105.739,70.807 105.739,71.264 105.952,71.186 105.952,70.886
  region net G_3: 109.676,76.903 109.676,77.36 109.889,77.282 109.889,76.982
  region net G_4: 109.676,75.887 109.676,76.344 109.889,76.266 109.889,75.966
  region net G_3: 113.557,78.351 113.234,78.675 113.139,78.468 113.351,78.256
  region net G_4: 113.463,76.903 113.463,77.36 113.25,77.282 113.25,76.982
  region net G_1: 113.43,70.832 113.107,70.509 113.012,70.715 113.224,70.927
  region net G_2: 113.303,64.101 112.98,63.778 112.885,63.984 113.097,64.196
  region net SENSOR_VN: 109.084,52.183 110.038,53.138 109.222,53.212 109.01,53
  region net SENSOR_VP: 106.544,52.183 107.498,53.138 106.682,53.212 106.47,53
  region net IO23: 104.004,52.183 104.958,53.138 104.142,53.212 103.93,53
  region net IO22: 101.464,52.183 102.418,53.138 101.602,53.212 101.39,53
  region net U0TXD: 98.924,52.183 99.878,53.138 99.062,53.212 98.85,53
  region net U0RXD: 97.404,53.131 96.382,52.249 96.368,53.069 96.595,53.266
  region net IO21: 95.417,52.835 94.067,52.835 94.592,53.465 94.892,53.465
  region net IO19: 92.658,53.015 91.375,52.596 91.671,53.355 91.971,53.453
  region net IO18: 90.337,52.835 88.987,52.835 89.512,53.465 89.812,53.465
  region net IO5: 87.978,52.516 86.74,53.055 87.463,53.428 87.758,53.299
  region net IO17: 85.479,52.316 84.395,53.12 85.19,53.314 85.434,53.133
  region net IO16: 81.986,53.138 82.94,52.183 83.014,53 82.802,53.212
  region net IO4: 80.177,52.835 78.827,52.835 79.352,53.256 79.652,53.256
  region net IO0: 77.637,52.835 76.287,52.835 76.762,53.465 77.162,53.465

## Silkscreen, mask and mechanical layers (free items; w line width, h text height)
Bottom Overlay:
  text "Designed in Greece" at 134.239,85.295 h1.2
  text "14" at 141.859,84.625 h2.03 r90
  text "EN" at 108.52,83.99 h1.4 r270
  text "V+" at 62.8,83.609 h1.4 r270
  text "V+" at 65.34,83.609 h1.4 r270
  text "V+" at 67.88,83.609 h1.4 r270
  text "V+" at 70.42,83.609 h1.4 r270
  text "SDI" at 78.04,83.482 h1.4 r270
  text "IO2" at 72.96,83.355 h1.4 r270
  text "IO15" at 75.5,82.593 h1.4 r270
  text "CLK" at 83.12,82.593 h1.4 r270
  text "SD3" at 88.2,82.593 h1.4 r270
  text "SD2" at 90.74,82.593 h1.4 r270
  text "IO13" at 93.28,82.593 h1.4 r270
  text "IO12" at 95.82,82.593 h1.4 r270
  text "GND" at 111.06,82.593 h1.4 r270
  text "SDO" at 80.58,82.466 h1.4 r270
  text "CMD" at 85.66,82.339 h1.4 r270
  text "IO26" at 98.36,82.085 h1.4 r270
  text "IO35" at 103.44,82.085 h1.4 r270
  text "IO34" at 105.98,82.085 h1.4 r270
  text "IO25" at 100.9,81.958 h1.4 r270
  text "27" at 141.859,79.418 h2.03 r90
  text "V+" at 53.975,79.037 h2.03 r270
  text "4CH-ESP32 POWER MODULE v0.1" at 116.205,75.227 h2.03
  text "GND" at 53.975,72.306 h2.03 r270
  text "ALMIDI" at 116.332,72.322 h2
  text "V+" at 141.732,71.544 h2.03 r90
  text "33" at 141.859,64.305 h2.03 r90
  text "5-24V" at 65.659,61.384 h2.03 r270
  text "32" at 141.859,59.098 h2.03 r90
  text "IO21" at 95.82,54.145 h1.4 r270
  text "GND" at 62.8,54.018 h1.4 r270
  text "GND" at 65.34,54.018 h1.4 r270
  text "GND" at 67.88,54.018 h1.4 r270
  text "3V3" at 70.42,54.018 h1.4 r270
  text "3V3" at 72.96,54.018 h1.4 r270
  text "IO0" at 75.5,54.018 h1.4 r270
  text "IO4" at 78.04,54.018 h1.4 r270
  text "IO16" at 80.58,54.018 h1.4 r270
  text "IO17" at 83.12,54.018 h1.4 r270
  text "IO05" at 85.66,54.018 h1.4 r270
  text "IO18" at 88.2,54.018 h1.4 r270
  text "IO19" at 90.74,54.018 h1.4 r270
  text "IO24" at 93.28,54.018 h1.4 r270
  text "U0RXD" at 98.36,54.018 h1.4 r270
  text "U0TXD" at 100.9,54.018 h1.4 r270
  text "IO22" at 103.44,54.018 h1.4 r270
  text "IO23" at 105.98,54.018 h1.4 r270
  text "SENSOR_VR" at 108.52,54.018 h1.4 r270
  text "SENSOR_VN" at 111.06,54.018 h1.4 r270